# Altium PCB Wakame.PcbDoc (part 2 of 2)
Units mm, origin at the board's own origin, x right, y up, seen from the top; angles counter-clockwise.
Board outline 150 x 150 mm, 5 copper layers (FrontLayer, MidLayer1, MidLayer2, MidLayer3, BackLayer); 108 components, 145 nets, 766 pads, 136 vias.
Unrouted connection lines stored in the file: 5.
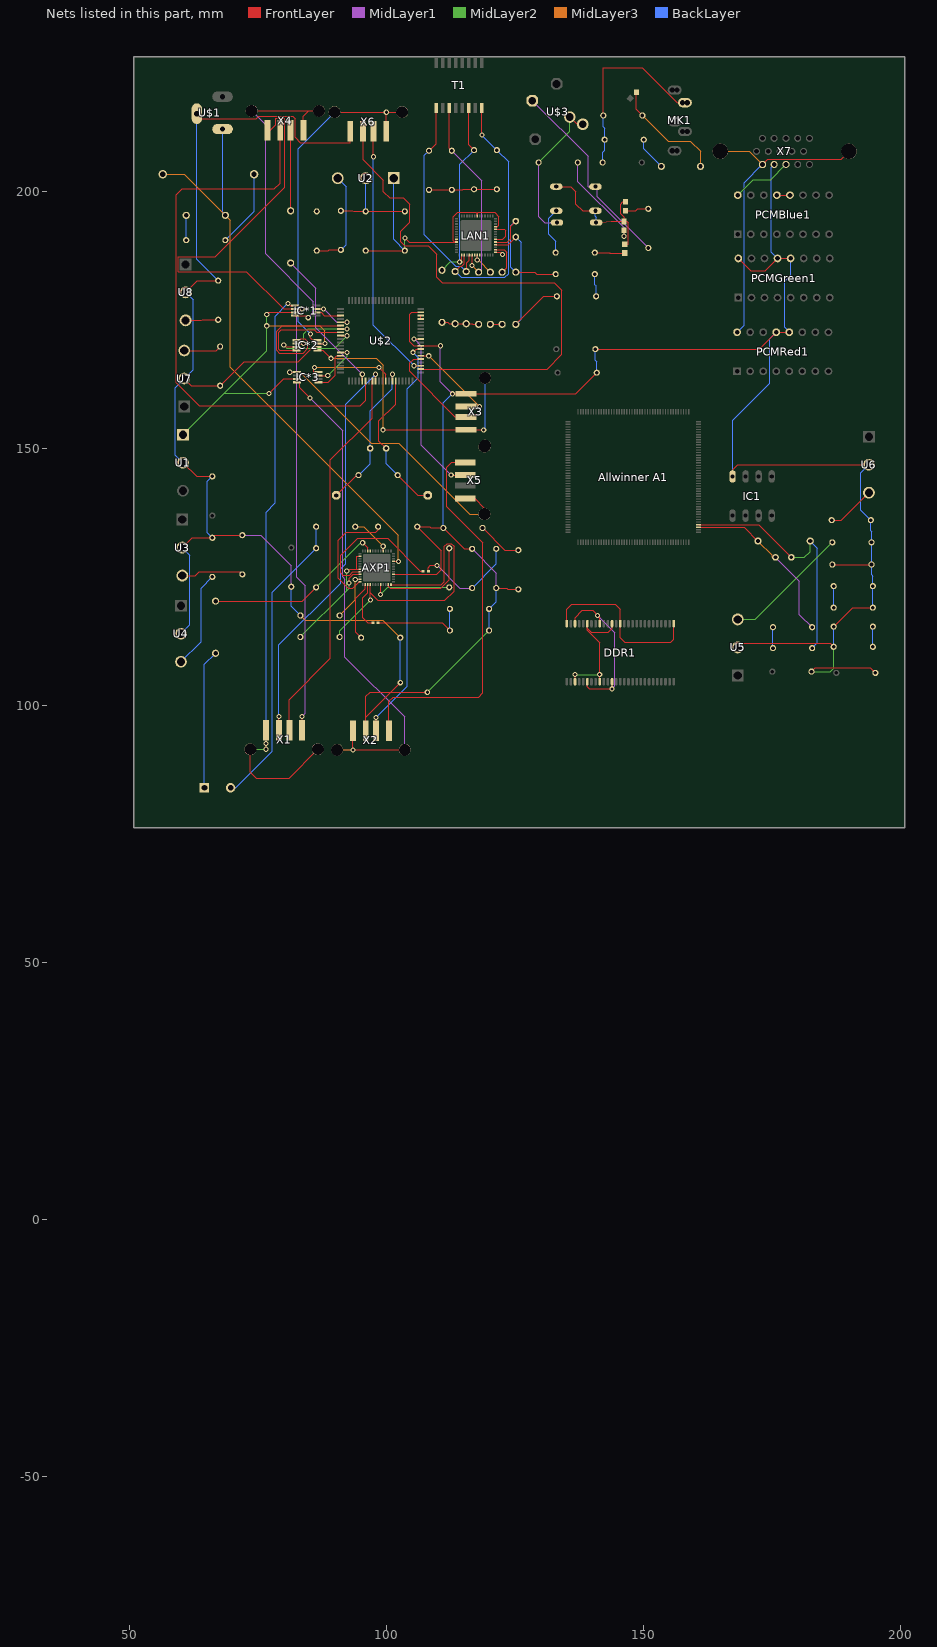
[diagram p5: the nets of this part, all layers, seen from the top]

## Via types
v1: diameter 1, hole 0.6, FrontLayer to BackLayer, 136 vias

## Nets (pads, with @x,y where several pads share a name; then routed paths per layer and width w, separated by ;. In a path a pad name is that pad's centre, name@x,y a point inside that pad or via, vN(x,y) a via of type N, cw(c..) or ccw(c..) an arc to the next point about the centre after c; other vN are vias at no path point) (continued)
"NetAllwinner A1_X24MIN": "Allwinner A1.X24MIN" C27.1 R16.1 Y3.1 | length 48.7
  FrontLayer w0.2: 160.655,135.149 172.344,135.149 Y3.1@178.715,128.778
  MidLayer2 w0.2: Y3.1@178.715,128.778 181.254,128.778 182.372,129.896 R16.1@182.372,131.953
  BackLayer w0.2: R16.1@182.372,131.953 183.769,130.556 183.769,112.141 C27.1@182.753,111.125
"NetAllwinner A1_X24OUT": "Allwinner A1.X24OUT" C28.2 R16.2 Y3.2 | length 34.2
  FrontLayer w0.2: 160.655,134.649 169.516,134.649 R16.2@172.212,131.953
  MidLayer1 w0.2: Y3.2@175.615,128.778 180.289,124.104 180.289,117.653 C28.2@182.753,115.189
  MidLayer3 w0.2: R16.2@172.212,131.953 174.981,129.184 174.981,128.778 Y3.2@175.615,128.778
NetAXP1_ACIN: AXP1.ACIN D4.2 R7.1 U$1.+ | length 114.7
  FrontLayer w0.2: AXP1.ACIN@101.321,127.996 v1(102.235,127.996)
  MidLayer3 w0.2: D4.2@56.388,203.327 60.579,203.327 R7.1@68.58,195.326 69.52,194.386 69.52,165.811 102.235,133.096 v1(102.235,127.996)
  BackLayer w0.2: U$1.+@68.032,212.115 68.032,195.874 R7.1@68.58,195.326
NetAXP1_BIAS: AXP1.BIAS C13.1 | length 19.2
  FrontLayer w0.2: AXP1.BIAS@100.294,123.471 100.294,123.139 100.7,122.733 110.465,122.733 112.141,124.409 C13.1@112.141,130.556
NetAXP1_EXTEN: AXP1.EXTEN C13.2 | length 15.8
  FrontLayer w0.2: v1(98.794,121.578) AXP1.EXTEN@98.794,123.471
  MidLayer2 w0.2: v1(98.794,121.578) 100.152,122.936 C13.2@112.141,122.936
NetAXP1_LDO1: AXP1.LDO1 C7.2 C9.2 C10.2 C12.2 C15.2 C17.2 C18.2 C22.1 C22.2 C33.1 C34.2 C35.1 C36.1 C37.2 C38.1 C39.1 C40.2 C41.1 C42.1 C43.2 C44.1 C45.1 C46.2 C47.1 C48.1 C49.2 C50.1 IC1.4 IC*2.6 PCMGreen1.12 PCMGreen1.13 PCMGreen1.16 PCMRed1.12 PCMRed1.13 U1.2 U3.2 U4.2 U5.2 U6.2 U7.2 U8.2 U$1.GND U$2.SELF_PWR U$2.USBDN5 X2.2 X3.4 X6.4 X7.2 | length 673.2
  FrontLayer w0.2: U3.2@60.198,130.683 62.103,132.588 C37.2@66.04,132.588 66.548,133.096 C34.2@71.882,133.096 ; U1.2@60.325,147.193 62.992,144.526 C33.1@66.04,144.526 ; U7.2@60.579,163.576 61.976,162.179 C46.2@67.564,162.179 72.212,166.827 82.804,166.827 85.705,169.728 IC*2.6@86.53,169.728 ; U8.2@60.833,180.34 63.119,182.626 C49.2@67.183,182.626 ; U$1.GND@63.017,215.113 63.017,214.122 74.6,214.122 75.108,214.63 81.686,214.63 82.169,214.147 82.169,210.49 83.185,209.474 92.888,209.474 X6.4@92.888,211.658 ; AXP1.LDO1@101.321,125.496 109.728,125.496 110.586,126.354 110.586,130.079 C18.2@105.918,134.747 108.331,134.747 108.585,134.493 C42.1@110.998,134.493 115.062,130.429 C12.2@116.586,130.429 ; v1(102.616,104.394) 100.762,102.54 ; U$2.SELF_PWR@106.606,176.467 104.851,176.467 104.496,176.111 104.496,170.688 105.232,169.951 U$2.USBDN5@106.606,169.951 v1(110.414,169.951) ; v1(107.874,102.54) 100.762,102.54 ; v1(112.751,160.604) X3.4@115.392,160.604 136.728,160.604 C50.1@140.843,164.719 ; C15.2@121.285,122.809 123.317,122.809 123.571,122.555 C44.1@125.603,122.555 ; C48.1@140.589,169.291 172.466,169.291 PCMRed1.13@175.768,172.593 PCMRed1.12@178.308,172.593 ; IC1.4@167.259,144.526 167.259,145.821 168.25,146.812 U6.2@193.802,146.812 ; U5.2@168.275,111.252 168.275,112.039 168.3,112.065 186.258,112.065 C36.1@186.944,111.379 ; PCMGreen1.16@168.402,186.944 170.84,184.506 173.584,184.506 PCMGreen1.13@176.022,186.944 PCMGreen1.12@178.562,186.944 ; C39.1@182.626,106.553 183.388,107.315 194.056,107.315 C41.1@195.072,106.299 ; C22.2@186.69,127.381 C22.1@194.31,127.381 ; C38.1@186.944,115.316 190.627,118.999 C45.1@194.564,118.999 ; 95.901,97.679 100.762,102.54 ; 95.901,97.679 95.901,101.718 96.723,102.54 100.762,102.54 ; 95.901,97.679 X2.2@95.901,95.047 95.901,97.679
  MidLayer1 w0.2: C34.2@71.882,133.096 75.463,133.096 81.407,127.152 C35.1@81.407,123.063 ; v1(110.414,169.951) 110.414,162.941 v1(112.751,160.604) ; C12.2@116.586,130.429 121.285,125.73 C15.2@121.285,122.809
  MidLayer2 w0.2: v1(107.874,102.54) C9.2@119.888,114.554 ; C39.1@182.626,106.553 186.309,106.553 186.944,107.188 C36.1@186.944,111.379
  MidLayer3 w0.2: C17.2@83.185,117.475 84.125,116.535 99.238,116.535 C10.2@102.616,113.157
  BackLayer w0.2: U4.2@59.944,113.919 61.671,115.646 61.671,129.21 U3.2@60.198,130.683 ; U1.2@60.325,147.193 58.826,148.692 58.826,161.823 U7.2@60.579,163.576 62.306,165.303 62.306,178.867 U8.2@60.833,180.34 ; U$1.GND@63.017,215.113 63.017,186.792 C49.2@67.183,182.626 ; C37.2@66.04,132.588 65.1,133.528 65.1,143.586 C33.1@66.04,144.526 ; C35.1@81.407,123.063 81.407,119.253 C17.2@83.185,117.475 ; v1(102.616,104.394) C10.2@102.616,113.157 ; C42.1@110.998,134.493 110.998,158.852 v1(112.751,160.604) ; C9.2@119.888,114.554 C7.2@119.888,118.745 121.285,120.142 C15.2@121.285,122.809 ; C48.1@140.589,169.291 140.589,167.132 140.843,166.878 C50.1@140.843,164.719 ; IC1.4@167.259,144.526 167.259,155.423 174.473,162.636 174.473,171.298 PCMRed1.13@175.768,172.593 ; X7.2@175.362,205.232 174.828,204.699 174.828,188.138 PCMGreen1.13@176.022,186.944 ; PCMRed1.12@178.308,172.593 177.394,173.507 177.394,182.55 178.562,183.718 PCMGreen1.12@178.562,186.944 ; C36.1@186.944,111.379 C38.1@186.944,115.316 ; U6.2@193.802,146.812 192.227,145.237 192.227,137.973 C43.2@194.183,136.017 194.183,133.909 194.31,133.782 C40.2@194.31,131.699 C22.1@194.31,127.381 194.31,125.4 194.564,125.146 C47.1@194.564,123.19 C45.1@194.564,118.999
NetAXP1_LDO2: AXP1.LDO2 C18.1 | length 22.1
  FrontLayer w0.2: AXP1.LDO2@94.769,123.996 94.64,123.996 93.377,122.733 92.514,122.733 90.576,124.67 90.576,132.105 92.1,133.629 97.815,133.629 98.298,134.112 C18.1@98.298,134.747
NetAXP1_LDO3IN: AXP1.LDO3IN C26.1 | length 7.9
  FrontLayer w0.2: v1(99.289,130.937) 99.294,130.932 AXP1.LDO3IN@99.294,130.023
  MidLayer3 w0.2: C26.1@93.853,134.747 95.479,134.747 v1(99.289,130.937)
NetAXP1_LDO4: AXP1.LDO4 C17.1 | length 9.2
  FrontLayer w0.2: v1(93.853,124.485) 93.864,124.496 AXP1.LDO4@94.769,124.496
  MidLayer3 w0.2: C17.1@90.805,117.475 93.853,120.523 v1(93.853,124.485)
NetAXP1_LX: AXP1.LX L1.1 | length 9.2
  FrontLayer w0.2: AXP1.LX@96.294,123.471 96.294,121.846 95.352,120.904 95.352,117.043 96.317,116.078 L1.1@97.29,116.078
NetAXP1_LX1: AXP1.LX1
NetAXP1_LX2: AXP1.LX2 L2.1 | length 27.7
  FrontLayer w0.2: AXP1.LX2@94.769,125.996 93.408,125.996 92.736,125.324 91.453,125.324 90.996,125.781 90.996,129.146 94.31,132.461 100.178,132.461 106.528,126.111 L2.1@107.069,126.111
NetAXP1_PGND1: AXP1.PGND1 C24.1 R15.1 | length 35.3
  FrontLayer w0.2: R15.1@66.675,120.269 83.566,120.269 C24.1@86.233,122.936 ; v1(95.301,131.623) 96.294,130.63 AXP1.PGND1@96.294,130.023
  MidLayer2 w0.2: C24.1@86.233,122.936 94.92,131.623 v1(95.301,131.623)
NetAXP1_PGND2: AXP1.PGND2 AXP1.SCK AXP1.VIN2 C11.2 | length 40.7
  FrontLayer w0.2: v1(92.202,126.136) 92.562,126.496 94.183,126.496 ; v1(92.659,123.8) 92.659,124.681 93.474,125.496 AXP1.PGND2@94.769,125.496 ; AXP1.SCK@94.769,128.996 94.183,128.996 94.183,126.496 ; 94.183,126.496 AXP1.VIN2@94.769,126.496 94.183,126.496
  MidLayer2 w0.2: v1(92.202,126.136) 92.202,123.8 92.202,122.301 ; v1(92.659,123.8) 92.659,122.758 92.202,122.301 ; 92.202,122.301 C11.2@83.185,113.284 92.202,122.301
NetAXP1_PGND3: AXP1.PGND3 AXP1.VREF C11.1 | length 60.4
  FrontLayer w0.2: v1(96.794,120.472) 96.794,121.92 ; AXP1.VREF@100.813,123.471 100.813,123.469 110.592,123.469 111.201,124.079 111.201,130.897 111.774,131.47 112.558,131.47 113.081,130.948 113.081,122.225 111.303,120.447 98.267,120.447 96.794,121.92 ; 96.794,121.92 AXP1.PGND3@96.794,123.471 96.794,121.92
  MidLayer2 w0.2: C11.1@90.805,113.284 90.805,114.483 v1(96.794,120.472)
NetAXP1_VIN3: AXP1.VIN3 C10.1 | length 11.5
  FrontLayer w0.2: C10.1@94.996,113.157 93.98,114.173 93.98,120.843 95.794,122.657 AXP1.VIN3@95.794,123.471
NetC1_1: C1.1 R2.2 | length 6.6
  BackLayer w0.2: C1.1@149.987,210.058 149.987,208.28 R2.2@153.416,204.851
NetC1_2: C1.2 C4.2 C8.2 MK1.2 | length 35.9
  FrontLayer w0.2: C4.2@142.113,214.757 142.113,224.028 149.733,224.028 156.511,217.25
  BackLayer w0.2: C8.2@141.986,205.613 141.986,207.645 142.367,208.026 C1.2@142.367,210.058 142.367,212.268 142.113,212.522 C4.2@142.113,214.757
NetC2_1: C2.1 D1.C U$3.LEFT2 | length 39
  MidLayer1 w0.2: U$3.LEFT2@128.321,217.653 139.192,206.781 139.192,200.914 D1.C@140.589,200.914 140.894,200.914 140.894,198.958 C2.1@150.876,188.976
NetC2_2: C2.2 R3.1 | length 4.6
  FrontLayer w0.2: R3.1@146.431,196.254 148.463,196.254 148.805,196.596 C2.2@150.876,196.596
NetC3_1: C3.1 D3.C U$3.RIGHT1 U$3.RIGHT2 | length 29
  FrontLayer w0.2: U$3.RIGHT2@135.611,214.452 137.008,213.055 U$3.RIGHT1@138.125,213.055
  MidLayer1 w0.2: C3.1@129.54,205.613 129.54,195.072 130.683,193.929 D3.C@133.096,193.929
  MidLayer2 w0.2: C3.1@129.54,205.613 135.611,211.684 U$3.RIGHT2@135.611,214.452
NetC3_2: C3.2 R5.1 | length 19.3
  FrontLayer w0.2: v1(146.177,191.262) R5.1@146.177,192.444
  MidLayer1 w0.2: C3.2@137.16,205.613 137.16,201.905 146.177,192.888 v1(146.177,191.262)
NetC4_1: C4.1 R2.1 R4.2 | length 22.1
  FrontLayer w0.2: R4.2@148.556,219.295 148.556,215.934 C4.1@149.733,214.757
  MidLayer3 w0.2: C4.1@149.733,214.757 154.762,209.728 159.08,209.728 161.036,207.772 R2.1@161.036,204.851
NetC5_1: C5.1 J1.2 U$2.XTAL2 Y1.1 | length 29.6
  FrontLayer w0.2: J1.2@90.17,140.843 94.107,144.78 C5.1@94.488,144.78 ; U$2.XTAL2@101.081,163.119 101.081,164.403 v1(101.092,164.414)
  BackLayer w0.2: C5.1@94.488,144.78 96.748,147.04 Y1.1@96.748,149.987 96.748,157.277 101.092,161.621 v1(101.092,164.414)
NetC5_2: C5.2 J1.1 U$2.XTAL1/CLKIN Y1.2 | length 28.7
  FrontLayer w0.2: Y1.2@99.848,149.987 98.45,151.385 98.45,155.321 101.731,158.602 U$2.XTAL1/CLKIN@101.731,163.119 ; C5.2@102.108,144.78 106.045,140.843 J1.1@107.95,140.843
  BackLayer w0.2: Y1.2@99.848,149.987 99.848,147.04 C5.2@102.108,144.78
NetC6_1: C6.1 D2.C | length 9.3
  BackLayer w0.2: C6.1@132.842,188.087 132.842,190.322 131.47,191.694 131.47,194.716 D2.C@132.969,196.215
NetC6_2: C6.2 R6.1 | length 5.9
  FrontLayer w0.2: C6.2@140.462,188.087 143.332,188.087 143.42,187.999 R6.1@146.304,187.999
NetC7_1: C7.1 C9.1 L1.2 | length 18.8
  FrontLayer w0.2: L1.2@98.29,116.078 110.744,116.078 C9.1@112.268,114.554
  BackLayer w0.2: C9.1@112.268,114.554 C7.1@112.268,118.745
NetC12_1: C12.1 C15.1 L2.2 | length 20.8
  FrontLayer w0.2: L2.2@108.069,126.111 108.069,126.797 108.475,127.203 v1(109.779,127.203)
  MidLayer1 w0.2: v1(109.779,127.203) 114.173,122.809 C12.1@116.586,122.809
  BackLayer w0.2: C12.1@116.586,122.809 121.285,127.508 C15.1@121.285,130.429
NetC14_1: C14.1 R7.2 | length 4.8
  BackLayer w0.2: C14.1@60.96,190.5 R7.2@60.96,195.326
NetC14_2: C14.2 D4.1 | length 15.1
  BackLayer w0.2: C14.2@68.58,190.5 74.168,196.088 D4.1@74.168,203.327
NetC16_1: C16.1 LAN1.2 R11.2 T1.14 | length 37.1
  FrontLayer w0.2: v1(114.173,186.258) 114.579,186.665 LAN1.2@114.579,187.589 ; T1.14@115.951,216.214 115.951,209.042 C16.1@116.967,208.026
  MidLayer2 w0.2: R11.2@110.744,184.658 112.344,186.258 v1(114.173,186.258)
  BackLayer w0.2: v1(114.173,186.258) 114.173,205.232 C16.1@116.967,208.026
NetC16_2: C16.2 C19.2 C20.2 C21.2 | length 13.3
  FrontLayer w0.2: C20.2@108.204,200.279 C21.2@112.649,200.279 114.732,200.279 114.859,200.406 C16.2@116.967,200.406 C19.2@121.412,200.406
NetC19_1: C19.1 LAN1.3 R10.2 T1.16 | length 49.7
  FrontLayer w0.2: R10.2@113.284,184.404 114.275,185.395 114.605,185.395 115.087,185.877 LAN1.3@115.087,187.589 ; v1(118.491,210.947) T1.16@118.491,216.214
  BackLayer w0.2: R10.2@113.284,184.404 114.452,183.236 122.961,183.236 123.723,183.998 123.723,205.715 C19.1@121.412,208.026 v1(118.491,210.947)
NetC20_1: C20.1 LAN1.5 R9.2 T1.9 | length 40.3
  FrontLayer w0.2: C20.1@108.204,207.899 109.601,209.296 T1.9@109.601,216.214 ; R9.2@115.443,184.404 115.443,185.013 115.57,185.013 115.57,186.131 116.078,186.639 LAN1.5@116.078,187.589
  BackLayer w0.2: C20.1@108.204,207.899 107.29,206.985 107.29,191.542 113.386,185.445 114.402,185.445 R9.2@115.443,184.404
NetC21_1: C21.1 LAN1.6 R8.2 T1.11 | length 38.6
  FrontLayer w0.2: T1.11@112.141,216.214 112.141,208.407 C21.1@112.649,207.899 ; v1(116.586,185.547) LAN1.6@116.586,187.589
  MidLayer1 w0.2: C21.1@112.649,207.899 118.44,202.108 118.44,184.861 R8.2@117.856,184.277
  MidLayer3 w0.2: v1(116.586,185.547) R8.2@117.856,184.277
NetC23_1: C23.1 C25.2 | length 4.4
  BackLayer w0.2: C25.2@140.462,183.896 140.462,181.864 140.716,181.61 C23.1@140.716,179.578
NetC23_2: C23.2 LAN1.18 R14.2 Y2.2 | length 32.7
  FrontLayer w0.2: LAN1.18@121.148,189.639 123.625,189.639 Y2.2@125.095,191.109 ; R14.2@125.095,174.117 130.556,179.578 C23.2@133.096,179.578
  BackLayer w0.2: R14.2@125.095,174.117 126.136,175.158 126.136,190.068 Y2.2@125.095,191.109
NetC24_2: C24.2 C26.2 S1.2 | length 58.3
  BackLayer w0.2: S1.2@69.596,83.947 70.612,83.947 77.699,91.034 77.699,122.022 C24.2@86.233,130.556 C26.2@86.233,134.747
NetC25_1: C25.1 LAN1.19 R14.1 Y2.1 | length 25.7
  FrontLayer w0.2: LAN1.19@121.148,190.139 123.439,190.139 124.104,190.805 124.104,193.218 Y2.1@125.095,194.209 ; R14.1@125.095,184.277 128.778,184.277 129.159,183.896 C25.1@132.842,183.896
  BackLayer w0.2: R14.1@125.095,184.277 124.145,185.227 124.145,193.259 Y2.1@125.095,194.209
NetC27_2: C27.2 C28.1 | length 4.1
  BackLayer w0.2: C27.2@175.133,111.125 C28.1@175.133,115.189
NetC29_1: C29.1 C31.1 C32.2 U2.2 | length 19
  FrontLayer w0.2: C32.2@91.059,196.215 93.396,196.215 93.523,196.088 C29.1@95.885,196.088 C31.1@103.505,196.088
  BackLayer w0.2: C29.1@95.885,196.088 U2.2@95.885,202.565
NetC29_2: C29.2 C31.2 LAN1.25 LAN1.35 LAN1.51 LAN1.52 U2.1 | length 54
  FrontLayer w0.2: C29.2@95.885,188.468 C31.2@103.505,188.468 ; v1(103.505,190.952) 104.318,190.139 113.182,190.139 ; LAN1.51@113.538,190.639 LAN1.52@113.538,190.139 ; LAN1.35@117.598,195.199 117.598,195.682 ; LAN1.25@121.148,193.142 121.514,193.142 121.768,193.396 121.768,195.072 120.955,195.885 117.801,195.885 117.598,195.682 ; 113.182,190.139 LAN1.52@113.538,190.139 ; 113.182,190.139 112.928,190.393 112.928,195.097 113.792,195.961 117.319,195.961 117.598,195.682 ; 113.182,190.139 LAN1.52@113.538,190.139
  MidLayer2 w0.2: C31.2@103.505,188.468 v1(103.505,190.952)
  BackLayer w0.2: U2.1@101.335,202.565 101.335,190.638 C31.2@103.505,188.468
NetC30_1: C30.1
NetC30_2: C30.2 C32.1 U2.3 | length 19.8
  FrontLayer w0.2: C30.2@86.36,188.468 88.646,188.468 88.773,188.595 C32.1@91.059,188.595
  BackLayer w0.2: U2.3@90.435,202.565 92.075,200.925 92.075,189.611 C32.1@91.059,188.595
NetC34_1: C34.1 U3.3 | length 12.2
  FrontLayer w0.2: U3.3@60.198,125.233 62.738,125.233 63.489,125.984 71.374,125.984 C34.1@71.882,125.476
NetC36_2: C36.2 C38.2 | length 3.9
  BackLayer w0.2: C36.2@194.564,111.379 C38.2@194.564,115.316
NetC37_1: C37.1 U4.3 | length 19
  BackLayer w0.2: U4.3@59.944,108.469 63.881,112.406 63.881,122.809 C37.1@66.04,124.968
NetC40_1: C40.1 U5.3 | length 24.6
  MidLayer2 w0.2: U5.3@168.275,116.702 171.693,116.702 C40.1@186.69,131.699
NetC42_2: C42.2 C44.2 | length 8.8
  FrontLayer w0.2: C42.2@118.618,134.493 122.936,130.175 C44.2@125.603,130.175
NetC43_1: C43.1 U6.3 | length 9.5
  FrontLayer w0.2: C43.1@186.563,136.017 188.457,136.017 U6.3@193.802,141.362
NetC45_2: C45.2 C47.2 | length 4.2
  BackLayer w0.2: C45.2@186.944,118.999 C47.2@186.944,123.19
NetC46_1: C46.1 U7.3 | length 7.3
  FrontLayer w0.2: U7.3@60.579,169.026 66.791,169.026 C46.1@67.564,169.799
NetC49_1: C49.1 U8.3 | length 6.4
  FrontLayer w0.2: U8.3@60.833,174.89 63.932,174.89 64.048,175.006 C49.1@67.183,175.006
NetD1_A: D1.A D2.A D3.A R3.2 R5.2 R6.2 | length 29.4
  FrontLayer w0.2: D1.A@132.969,200.914 135.814,200.914 136.779,199.949 136.779,197.51 138.074,196.215 D2.A@140.589,196.215 ; D3.A@140.716,193.929 143.649,194.144 R5.2@146.177,194.144 ; R6.2@146.304,189.699 146.99,189.699 147.015,189.724 147.015,193.839 146.71,194.144 R5.2@146.177,194.144 ; R3.2@146.431,197.954 145.898,197.954 145.478,197.535 145.478,195.675 146.177,194.977 R5.2@146.177,194.144
  BackLayer w0.2: D2.A@140.589,196.215 140.589,195.123 140.716,194.996 D3.A@140.716,193.929
NetDDR1_3: DDR1.3 DDR1.9 DDR1.43 DDR1.49 | length 27.1
  FrontLayer w0.2: DDR1.3@136.615,104.586 136.615,105.957 v1(136.627,105.969) ; DDR1.43@143.815,115.886 143.815,114.986 143.053,114.224 139.802,114.224 139.015,115.01 ; 139.015,115.01 DDR1.49@139.015,115.886 139.015,115.01 ; 139.015,115.01 139.015,114.605 141.415,112.205 v1(141.415,105.969) ; v1(141.415,105.969) DDR1.9@141.415,104.586 v1(141.415,105.969)
  MidLayer2 w0.2: v1(136.627,105.969) v1(141.415,105.969)
NetDDR1_6: DDR1.6 DDR1.12 DDR1.46 DDR1.52 | length 33.2
  FrontLayer w0.2: DDR1.52@136.615,115.886 136.615,117.043 138.012,118.44 140.018,118.44 141.015,117.444 141.415,117.043 ; DDR1.6@139.015,104.586 139.015,103.632 139.421,103.226 143.79,103.226 v1(143.815,103.2) DDR1.12@143.815,104.586 ; v1(141.021,117.45) 141.415,117.055 141.415,117.043 ; 141.415,117.043 DDR1.46@141.415,115.886 141.415,117.043
  MidLayer1 w0.2: v1(141.021,117.45) 144.374,114.097 144.374,103.759 v1(143.815,103.2)
NetDDR1_28: DDR1.28 DDR1.41 DDR1.54 | length 33.6
  FrontLayer w0.2: DDR1.54@135.015,115.886 135.015,118.669 135.955,119.609 144.475,119.609 145.415,118.669 DDR1.41@145.415,115.886 145.415,113.132 146.304,112.243 155.245,112.243 155.815,112.813 DDR1.28@155.815,115.886
NetIC*1_2: IC*1.2 U$2.OCS2_N | length 5
  FrontLayer w0.2: IC*1.2@86.276,176.459 87.193,176.459 87.835,175.817 U$2.OCS2_N@90.983,175.817
NetIC*1_3: IC*1.3 U$2.OCS3_N | length 8.4
  FrontLayer w0.2: IC*1.3@86.276,177.109 v1(87.681,177.109) ; U$2.OCS3_N@90.983,174.517 92.272,174.517 v1(92.278,174.523)
  MidLayer1 w0.2: v1(87.681,177.109) 90.266,174.523 v1(92.278,174.523)
NetIC*1_5: IC*1.5 X1.1 | length 118.8
  FrontLayer w0.2: X1.1@73.44,91.44 73.44,86.97 74.583,85.827 80.975,85.827 X1.1@86.589,91.44 ; v1(76.505,92.532) v1@76.51,92.537 ; v1(76.51,91.44) 76.51,92.532 v1@76.51,92.537 ; v1(80.756,178.181) 81.178,177.759 IC*1.5@82.126,177.759 ; v1@76.51,92.537 X1.1@76.51,95.174 v1@76.51,92.537
  MidLayer2 w0.2: X1.1@73.44,91.44 v1(76.51,91.44)
  BackLayer w0.2: v1(76.505,92.532) 76.505,137.592 78.283,139.37 78.283,175.707 v1(80.756,178.181)
NetIC*1_6: IC*1.6 X1.4 X4.4 | length 158.2
  FrontLayer w0.2: X4.4@76.759,211.912 77.335,211.912 78.376,212.954 78.376,214.219 80.112,214.219 80.112,214.02 80.137,213.995 80.137,200.762 66.615,187.24 59.383,187.24 59.383,184.34 72.677,184.34 79.908,177.109 IC*1.6@82.126,177.109 v1(83.528,177.109) ; X1.4@83.515,95.174 v1(83.515,97.815)
  MidLayer1 w0.2: v1(83.515,97.815) 84.125,98.425 84.125,123.241 82.474,124.892 82.474,176.055 v1(83.528,177.109)
NetIC*1_7: IC*1.7 IC*2.7 IC*3.7 U1.1 | length 83
  FrontLayer w0.2: v1(76.632,176.047) 77.043,176.459 IC*1.7@82.126,176.459 ; v1(77.084,160.68) 79.908,163.505 IC*3.7@82.507,163.505 ; IC*2.7@86.53,170.378 87.93,170.378 v1(87.935,170.383)
  MidLayer2 w0.2: v1(76.632,176.047) v1(76.632,173.838) ; v1(77.084,160.68) 68.362,160.68 ; 68.362,160.68 76.632,168.95 ; 68.362,160.68 U1.1@60.325,152.643 68.362,160.68 ; 76.632,168.95 v1(76.632,173.838) ; 76.632,168.95 v1(76.632,173.838)
  MidLayer3 w0.2: v1(76.632,173.838) 86.97,173.838 87.935,172.872 v1(87.935,170.383)
NetIC*1_8: IC*1.8 X4.1 | length 67.7
  FrontLayer w0.2: X4.1@73.685,215.646 84.831,215.646 ; IC*1.8@82.126,175.809 84.312,175.809 v1(84.709,175.412) ; X4.1@83.764,211.912 83.764,214.579 84.831,215.646 ; 84.831,215.646 X4.1@86.834,215.646 84.831,215.646
  MidLayer1 w0.2: X4.1@73.685,215.646 76.403,212.928 76.403,187.833 85.674,178.562 85.674,176.378 v1(84.709,175.412)
NetIC*2_1: IC*2.1 U$2.PRTPWR4 | length 27.1
  FrontLayer w0.2: IC*2.1@82.38,171.028 83.007,171.028 83.277,171.298 84.039,171.298 84.633,170.704 84.633,169.469 83.693,168.529 79.096,168.529 78.537,169.088 78.537,172.771 79.633,173.867 U$2.PRTPWR4@90.983,173.867
NetIC*2_2: IC*2.2 U$2.OCS4_N | length 13.5
  FrontLayer w0.2: IC*2.2@82.38,170.378 v1(83.795,170.378) ; U$2.OCS4_N@90.983,173.217 92.267,173.217 v1(92.278,173.228)
  MidLayer2 w0.2: v1(83.795,170.378) 83.795,172.288 84.734,173.228 v1(92.278,173.228)
NetIC*2_3: IC*2.3 U$2.VSS5 | length 17.5
  FrontLayer w0.2: v1(79.934,170.129) 80.335,169.728 IC*2.3@82.38,169.728 ; U$2.VSS5@90.983,171.917 92.268,171.917 v1(92.278,171.907)
  MidLayer2 w0.2: v1(79.934,170.129) 80.569,169.494 89.865,169.494 v1(92.278,171.907)
NetIC*2_4: IC*2.4 U$2.PRTPWR5 | length 19.2
  FrontLayer w0.2: IC*2.4@82.38,169.078 79.182,169.078 78.969,169.291 78.969,172.542 79.477,173.05 85.912,173.05 86.396,172.567 U$2.PRTPWR5@90.983,172.567
NetIC*2_5: IC*2.5 X3.1 | length 56.3
  FrontLayer w0.2: IC*2.5@86.53,169.078 87.564,169.078 v1(89.129,167.513) ; v1(99.263,153.599) X3.1@115.392,153.599 118.841,153.599 v1(118.847,153.594)
  MidLayer3 w0.2: v1(89.129,167.513) 97.917,167.513 99.263,166.167 v1(99.263,153.599)
  BackLayer w0.2: v1(118.847,153.594) 119.126,153.873 X3.1@119.126,163.678
NetIC*2_8: IC*2.8 X6.1 | length 69.4
  FrontLayer w0.2: v1(85.115,172.247) 85.115,171.501 85.588,171.028 IC*2.8@86.53,171.028 ; X6.1@89.814,215.392 v1(99.893,215.392) ; X6.1@99.893,211.658 v1(99.893,215.392) ; X6.1@102.963,215.392 v1(99.893,215.392)
  MidLayer2 w0.2: v1(99.893,215.392) X6.1@102.963,215.392
  BackLayer w0.2: v1(85.115,172.247) 82.728,174.635 82.728,208.305 X6.1@89.814,215.392
NetIC*3_1: IC*3.1 U$2.PRTPWR7 | length 8.5
  FrontLayer w0.2: IC*3.1@86.657,162.855 88.595,162.855 89.941,164.201 89.941,167.716 90.221,167.996 U$2.PRTPWR7@90.983,167.996
NetIC*3_3: IC*3.3 U$2.OCS6_N | length 9.2
  FrontLayer w0.2: IC*3.3@86.657,164.155 v1(88.494,164.155) ; U$2.OCS6_N@90.983,168.656 v1(92.278,168.656)
  MidLayer2 w0.2: v1(88.494,164.155) 92.278,167.94 v1(92.278,168.656)
NetIC*3_4: IC*3.4 U$2.VDD18.2 | length 17.6
  FrontLayer w0.2: v1(85.954,165.735) 85.75,165.532 85.75,164.805 IC*3.4@86.657,164.805 ; v1(98.45,165.735) 99.781,164.404 U$2.VDD18.2@99.781,163.119
  MidLayer3 w0.2: v1(85.954,165.735) v1(98.45,165.735)
NetIC*3_5: IC*3.5 X5.1 | length 56.4
  FrontLayer w0.2: v1(81.102,164.805) IC*3.5@82.507,164.805 ; X5.1@115.265,140.264 117.114,140.264 118.999,138.379 X5.1@118.999,137.194
  MidLayer3 w0.2: v1(81.102,164.805) 83.15,164.805 96.977,150.978 102.311,150.978 116.095,137.194 X5.1@118.999,137.194
NetIC*3_8: IC*3.8 X2.1 | length 100.5
  FrontLayer w0.2: IC*3.8@82.507,162.855 83.083,162.855 83.083,161.747 v1(85.039,159.791) ; X2.1@90.331,91.313 v1(93.401,91.313) ; X2.1@93.401,95.047 v1(93.401,91.313) ; X2.1@103.48,91.313 v1(93.401,91.313)
  MidLayer1 w0.2: v1(85.039,159.791) 91.39,153.441 91.39,124.98 91.846,124.524 91.846,109.372 103.48,97.739 X2.1@103.48,91.313
  MidLayer2 w0.2: X2.1@90.331,91.313 v1(93.401,91.313)
NetLAN1_7: LAN1.7 LAN1.9 LAN1.15 | length 1.5
  FrontLayer w0.2: LAN1.15@121.148,188.139 122.123,188.139 122.486,187.776 v1(122.486,187.733)
NetLAN1_8: LAN1.8 R12.2 | length 4.5
  FrontLayer w0.2: v1(117.598,186.665) LAN1.8@117.598,187.589
  MidLayer3 w0.2: v1(117.598,186.665) 117.754,186.665 R12.2@120.142,184.277
NetLAN1_16: LAN1.16 R13.1 | length 6.6
  FrontLayer w0.2: LAN1.16@121.148,188.639 122.816,188.639 123.317,188.138 123.317,185.166 R13.1@122.428,184.277
NetLAN1_20: LAN1.20 LAN1.24 | length 5.5
  FrontLayer w0.2: LAN1.20@121.148,190.639 122.542,190.639 123.139,191.237 123.139,192.405 122.885,192.659 LAN1.24@121.148,192.659
NetPCMBlue1_12: PCMBlue1.12 PCMBlue1.13 | length 2.5
  FrontLayer w0.2: PCMBlue1.13@175.895,199.263 PCMBlue1.12@178.435,199.263
NetPCMBlue1_16: PCMBlue1.16 X7.3 | length 11.9
  MidLayer2 w0.2: PCMBlue1.16@168.275,199.263 171.298,202.286 174.716,202.286 X7.3@177.662,205.232
NetPCMRed1_16: PCMRed1.16 X7.1 | length 61.8
  FrontLayer w0.2: X7.1@173.076,205.232 174.092,206.248 188.395,206.248 X7.1@189.919,207.772
  MidLayer3 w0.2: X7.1@164.897,207.772 170.536,207.772 X7.1@173.076,205.232
  BackLayer w0.2: PCMRed1.16@168.148,172.593 169.545,173.99 169.545,201.701 X7.1@173.076,205.232
NetR1_1: R1.1 X4.2 | length 15.7
  FrontLayer w0.2: X4.2@81.264,211.912 81.264,204.08 81.28,204.064 R1.1@81.28,196.215
NetR1_2: R1.2 U$2.USBDN1 | length 28.7
  FrontLayer w0.2: U$2.USBDN1@95.225,163.119 v1(95.225,164.414)
  MidLayer1 w0.2: R1.2@81.28,186.055 86.208,181.127 86.208,173.431 v1(95.225,164.414)
NetR8_1: R8.1 R9.1 R10.1 R11.1 | length 7.3
  FrontLayer w0.2: R11.1@110.744,174.498 111.887,174.498 112.141,174.244 R10.1@113.284,174.244 R9.1@115.443,174.244 116.586,174.244 116.713,174.117 R8.1@117.856,174.117
NetR12_1: R12.1 R13.2 | length 2.3
  FrontLayer w0.2: R12.1@120.142,174.117 R13.2@122.428,174.117
NetR15_2: R15.2 S1.1 | length 27.1
  BackLayer w0.2: S1.1@64.516,83.947 64.516,107.95 R15.2@66.675,110.109
NetU$2_TEST0: U$2.TEST0 U$2.TEST1 | length 0.7
  FrontLayer w0.2: U$2.TEST0@106.606,175.167 U$2.TEST1@106.606,175.817
NetU$2_USBDN2: U$2.USBDN2 X1.2 | length 78.3
  FrontLayer w0.2: X1.2@79.01,95.174 v1(79.01,97.815) ; U$2.USBDN2@97.815,163.119 v1(97.815,164.414)
  BackLayer w0.2: v1(79.01,97.815) 79.01,111.801 90.996,123.787 90.996,126.55 91.973,127.527 91.973,158.572 v1(97.815,164.414)
NetU$2_USBDN3: U$2.USBDN3 X6.2 | length 50.2
  FrontLayer w0.2: v1(97.393,206.731) X6.2@97.393,211.658 ; v1(105.308,166.065) U$2.USBDN3@106.606,166.065
  BackLayer w0.2: v1(97.393,206.731) 97.393,173.981 v1(105.308,166.065)
NetU$2_USBDN4: U$2.USBDN4 X3.2 | length 18.7
  FrontLayer w0.2: U$2.USBDN4@106.606,167.361 105.232,167.361 104.47,166.599 104.47,165.024 113.182,156.099 X3.2@115.392,156.099
NetU$2_USBDN6: U$2.USBDN6 X5.3 | length 33.5
  FrontLayer w0.2: v1(105.308,171.272) 105.314,171.267 U$2.USBDN6@106.606,171.267 ; v1(112.522,144.78) X5.3@115.265,144.78
  MidLayer1 w0.2: v1(105.308,171.272) 106.731,169.85 106.731,150.571 v1(112.522,144.78)
NetU$2_USBDP1: U$2.USBDP1 X4.3 | length 111.1
  FrontLayer w0.2: X4.3@79.248,211.912 79.248,201.574 78.13,200.457 60.147,200.457 58.979,199.288 58.979,162.712 63.449,158.242 94.793,158.242 95.86,159.309 U$2.USBDP1@95.86,163.119
NetU$2_USBDP2: U$2.USBDP2 X1.3 | length 74.6
  FrontLayer w0.2: X1.3@81.026,95.174 81.026,101.117 89.027,109.118 89.027,147.726 97.18,155.88 U$2.USBDP2@97.18,163.119
NetU$2_USBDP3: U$2.USBDP3 X6.3 | length 106.5
  FrontLayer w0.2: X6.3@95.377,211.658 95.377,206.121 99.339,202.159 99.339,199.949 100.559,198.73 103.226,198.73 104.445,197.51 104.445,193.98 102.667,192.202 102.667,190.221 103.48,189.408 108.026,189.408 109.703,187.731 109.703,183.286 110.769,182.22 132.563,182.22 134.036,180.746 134.036,168.275 131.166,165.405 U$2.USBDP3@106.606,165.405
NetU$2_USBDP4: U$2.USBDP4 X3.3 | length 18.2
  FrontLayer w0.2: U$2.USBDP4@106.606,167.996 v1(108.153,167.996) ; X3.3@115.392,158.115 v1(118.034,158.115)
  MidLayer3 w0.2: v1(108.153,167.996) v1(118.034,158.115)
NetU$2_USBDP5: U$2.USBDP5 X2.3 | length 79.3
  FrontLayer w0.2: X2.3@97.917,95.047 v1(97.917,97.638) ; v1(105.054,168.681) 105.689,169.316 U$2.USBDP5@106.606,169.316
  BackLayer w0.2: v1(97.917,97.638) 103.962,103.683 103.962,161.544 106.147,163.728 106.147,167.589 v1(105.054,168.681)
NetX2_4: X2.4 X5.4 | length 75.4
  FrontLayer w0.2: X2.4@100.406,95.047 100.406,100.787 101.219,101.6 117.856,101.6 118.669,102.413 118.669,131.623 111.684,138.608 111.684,146.304 112.649,147.269 X5.4@115.265,147.269
pads on no net: "Allwinner A1.AGND" "Allwinner A1.CSI_D0/SDC_D0/PE4" "Allwinner A1.CSI_D2/SDC2_D2/PE6" "Allwinner A1.CSI_D3/SDC2_D3/PE7" "Allwinner A1.CSI_D4/SDC2_CMD/PE8" "Allwinner A1.CSI_D5/SDC2_CLK/PE9" "Allwinner A1.CSI_D6/UART1_TX/PE10" "Allwinner A1.CSI_D7/UART1_RX/PE11" "Allwinner A1.CSI_DI/SDC2_DI/PE5" "Allwinner A1.CSI_HSYNC/SP2_MOSI/P" "Allwinner A1.CSI_MCLK/SPI2_CLK/EI" "Allwinner A1.CSI_PCLK/SPI2_CS0/EI" "Allwinner A1.CSI_VSYNC/SPI2_MISO/" "Allwinner A1.DDR3_A13" "Allwinner A1.DDR3_A14" "Allwinner A1.DDR3_BA1" "Allwinner A1.DDR3_BA2" "Allwinner A1.DDR3_CK" "Allwinner A1.DDR3_CK_N" "Allwinner A1.DDR3_D0" "Allwinner A1.DDR3_D1" "Allwinner A1.DDR3_D2" "Allwinner A1.DDR3_D3" "Allwinner A1.DDR3_D4" "Allwinner A1.DDR3_D5" "Allwinner A1.DDR3_D6" "Allwinner A1.DDR3_D7" "Allwinner A1.DDR3_D9" "Allwinner A1.DDR3_D10" "Allwinner A1.DDR3_D11" "Allwinner A1.DDR3_D12" "Allwinner A1.DDR3_D13" "Allwinner A1.DDR3_D14" "Allwinner A1.DDR3_D15" "Allwinner A1.DDR3_DM0" "Allwinner A1.DDR3_DM1" "Allwinner A1.DDR3_DQS0_N" "Allwinner A1.DDR3_DQS1_N" "Allwinner A1.DDR3_ODT" "Allwinner A1.DDR3_R8" "Allwinner A1.DDR3_RAS" "Allwinner A1.DDR3_RST" "Allwinner A1.DDR3_WE" "Allwinner A1.DZQ" "Allwinner A1.HPBP" "Allwinner A1.HPCOM" "Allwinner A1.HPOUTL" "Allwinner A1.HPOUTR" "Allwinner A1.LCD_CLK/PD24" "Allwinner A1.LCD_D6/PD6" "Allwinner A1.LCD_D7/PD7" "Allwinner A1.LCD_D20/PD20" "Allwinner A1.LCD_VSYNC/PD27" "Allwinner A1.LRADC" "Allwinner A1.NALE/SPIO_MISO/PCI" "Allwinner A1.NC" "Allwinner A1.NCE0" "Allwinner A1.NCE1/SPIO0/PC3" "Allwinner A1.NCLE/SPIO_CLK/PC2" "Allwinner A1.NDQ0/SDC2_D0/PC8" "Allwinner A1.NDQ1/SDC2_D1/PC9" "Allwinner A1.NDQ2/SDC2_D2/PC10" "Allwinner A1.NDQ3/SDC2_D3/PC11" "Allwinner A1.NDQ4/SDC2_D4/PC12" "Allwinner A1.NDQ5/SDC2_D5/PC13" "Allwinner A1.NDQ6/SDC2_D6/PC14" "Allwinner A1.NDQ7/SDC2_D7/PC15" "Allwinner A1.NDQS/PC19" "Allwinner A1.NMI_N" "Allwinner A1.NRB0/SDC2_CMD/PC6" "Allwinner A1.NRB1/SDC2_CLK/PC7" "Allwinner A1.NRE" "Allwinner A1.NWE/SPIO_MOSI/PC0" "Allwinner A1.PB2/EINT16" "Allwinner A1.PB3/EINT17" "Allwinner A1.PB4_EINT18" "Allwinner A1.PB10/EINT24" "Allwinner A1.PB15" "Allwinner A1.PB16" "Allwinner A1.PB17" "Allwinner A1.PB18" "Allwinner A1.PG0/EINT0" "Allwinner A1.PG1/EINT1" "Allwinner A1.PG2/EINT2" "Allwinner A1.PG3/UART1_TX/EINT3" "Allwinner A1.PG4/UART1_RX/EINT14" "Allwinner A1.PG9/SPI1_CS0/UART3_T" "Allwinner A1.PG10/SPI1_CLK/UART3_" "Allwinner A1.PG11/SPI1_MOSI/EINT1" "Allwinner A1.PG12/SPI1_MISO/UART3" "Allwinner A1.RESET_N" "Allwinner A1.SDC0/PF1" "Allwinner A1.SDC0_DI/PF0" "Allwinner A1.SVREF" "Allwinner A1.TPX1" "Allwinner A1.TPX2" "Allwinner A1.TPY1" "Allwinner A1.TPY2" "Allwinner A1.TWI0-SCK/PB0" "Allwinner A1.TWIO-SDA/PB1" "Allwinner A1.UBOOT" "Allwinner A1.UDM0" "Allwinner A1.UDM1" "Allwinner A1.UDP0" "Allwinner A1.V33_HP" "Allwinner A1.V33_USB" "Allwinner A1.VCC1_DRAM" "Allwinner A1.VCC2" "Allwinner A1.VDD1_CPU" "Allwinner A1.VDD1_INT" "Allwinner A1.VDD2_CPU/PB10/EINT24" "Allwinner A1.VDD2_INT" "Allwinner A1.VDD3_CPU" "Allwinner A1.VDD4_CPU" "Allwinner A1.VDD5_CPU" "Allwinner A1.VRA1" "Allwinner A1.VRA2" "Allwinner A1.VRP" AXP1.ACIN1 AXP1.AGND AXP1.APS AXP1.BACKUP AXP1.BAT AXP1.BAT1 AXP1.BATSENSE AXP1.CHGLED AXP1.CHSENSE AXP1.DC3SET AXP1.DCDC2 AXP1.DCDC3 AXP1.EXP AXP1.GPIO0 AXP1.GPIO1 AXP1.GPIO2 AXP1.GPIO3 AXP1.IPSOUT AXP1.IPSOUT1 AXP1.IRQ AXP1.LDO3 AXP1.LDO24IN AXP1.N_OE AXP1.N_VBUSEN AXP1.PWREN AXP1.PWROK AXP1.PWRON AXP1.SDA AXP1.TS AXP1.VBUS AXP1.VIN1 AXP1.VINT DDR1.2 DDR1.4 DDR1.7 DDR1.8 DDR1.10 DDR1.13 DDR1.15 DDR1.16 DDR1.18 DDR1.19 DDR1.21 DDR1.38 DDR1.39 DDR1.40 DDR1.42 DDR1.44 DDR1.45 DDR1.47 DDR1.48 DDR1.50 DDR1.51 DDR1.53 IC1.3 IC1.7 IC*1.1 IC*3.2 IC*3.6 LAN1.1 LAN1.4 LAN1.10 LAN1.11 LAN1.12 LAN1.13 LAN1.14 LAN1.17 LAN1.21 LAN1.22 LAN1.23 LAN1.26 LAN1.27 LAN1.28 LAN1.29 LAN1.30 LAN1.31 LAN1.32 LAN1.33 LAN1.34 LAN1.36 LAN1.37 LAN1.38 LAN1.39 LAN1.40 LAN1.41 LAN1.42 LAN1.43 LAN1.44 LAN1.45 LAN1.46 LAN1.47 LAN1.48 LAN1.49 LAN1.50 LAN1.53 LAN1.54 LAN1.55 LAN1.56 LAN1.EPAD MK1.1A MK1.1B MK1.2A MK1.2B MK1.3 MK1.3A MK1.3B MK1.4 MK1.4A MK1.4B MK1.5 MK1.5A MK1.5B PCMBlue1.5 PCMBlue1.6 PCMBlue1.7 PCMBlue1.8 PCMBlue1.9 PCMBlue1.10 PCMBlue1.14 PCMBlue1.15 PCMGreen1.7 PCMGreen1.8 PCMGreen1.9 PCMGreen1.10 PCMGreen1.14 PCMGreen1.15 PCMRed1.7 PCMRed1.8 PCMRed1.9 PCMRed1.10 PCMRed1.14 PCMRed1.15 T1.1 T1.2 T1.3 T1.4 T1.5 T1.6 T1.7 T1.8 T1.10 T1.12 T1.13 T1.15 U1.3 U4.1 U6.1 U7.1 U$1.GND1 U$2.AM1/GANG_EN U$2.AM2/MTT_EN U$2.AM3 U$2.AM4/LED_EN U$2.AM5 U$2.AM6 U$2.AM7 U$2.ATEST/REG_EN U$2.CFG_SEL1 U$2.CLKIN_EN U$2.GR1/NON_REM0 U$2.GR2_NON_REM1 U$2.GR3/PRT_DIS0 U$2.GR4/PRT_DIS1 U$2.GR5 U$2.GR6 U$2.GR7 U$2.OCS1_N U$2.OCS5_N U$2.OCS7_N U$2.PRTPWR1 U$2.PRTPWR2 U$2.PRTPWR6 U$2.PRTPWR_POL U$2.RBIAS U$2.RESET_N U$2.SCL/SMBCLK/CFG_SEL0 U$2.SDA/SMBDATA U$2.USBDN7 U$2.USBDP0 U$2.USBDP6 U$2.USBDP7 U$2.VBUS_DET U$2.VDD18 U$2.VDD18.3 U$2.VDD33CR U$2.VDDA3.1 U$2.VDDA18/PLL U$2.VDDA33 U$2.VDDA33.2 U$2.VDDA33/PLL U$2.VSS U$2.VSS0 U$2.VSS1 U$2.VSS3 U$2.VSS4 U$2.VSS6 U$2.VSS7 U$2.VSS8 U$2.VSS9 U$3.GND U$3.LEFT1 X5.2 X7.4 X7.5 X7.6 X7.7 X7.8 X7.9 X7.10 X7.11 X7.12 X7.15
copper on no net: | length 124
  FrontLayer w0.2: 60.884,221.107 61.671,221.894 ; 70.993,219.71 71.044,219.761 ; 73.914,91.44 77.978,87.376 ; 85.014,213.538 85.598,214.122 ; 109.906,180.315 111.658,180.315 111.658,179.695 ; 110.668,180.289 111.176,180.797 ; 111.481,179.705 111.76,179.984 ; 113.563,193.351 113.563,193.939 ; 125.983,178.358 125.983,181.12 ; 126.644,225.577 126.644,227.533
  FrontLayer w0.254: 53.095,219.202 cw(c56.515,219.202) 59.935,219.202 ; 53.095,219.202 ccw(c56.515,219.202) 59.935,219.202 ; 53.095,219.202 cw(c56.515,219.202) 59.935,219.202 ; 53.095,219.202 ccw(c56.515,219.202) 59.935,219.202 ; 55,82.931 cw(c58.42,82.931) 61.84,82.931 cw(c58.42,82.931) 55,82.931 ; 190.509,82.804 cw(c193.929,82.804) 197.349,82.804 cw(c193.929,82.804) 190.509,82.804 ; 192.033,219.964 cw(c195.453,219.964) 198.873,219.964 cw(c195.453,219.964) 192.033,219.964

## Keep-outs
Keep-Out Layer:
  lines w0.254: 50.8,76.2 50.8,226.2 ; 50.8,76.2 200.8,76.2 ; 50.8,76.2 200.8,76.2 ; 50.8,76.2 50.8,226.2 ; 50.8,76.2 200.8,76.2 ; 50.8,76.2 50.8,226.2 ; 50.8,226.2 200.8,226.2 ; 50.8,226.2 200.8,226.2 ; 50.8,226.2 200.8,226.2 ; 200.8,76.2 200.8,226.2 ; 200.8,76.2 200.8,226.2 ; 200.8,76.2 200.8,226.2
  lines w0.3: 38.705,44.891 38.705,42.291 41.305,42.291 ; 38.705,56.338 41.305,56.338 ; 51.557,42.291 51.557,44.891 ; 51.557,203.738 51.557,56.338 198.956,56.338 ; 51.557,224.9 198.956,224.9 ; 194.564,-73.74 194.564,73.66

## Other copper
FrontLayer:
  text "Wakame Single Board Computer" at 110.236,94.615 h1.52
  text "Licenced under GNU LGPL terms" at 110.744,88.519 h1.52
  text "2016, 2017" at 156.464,88.519 h1.52

## Silkscreen, mask and mechanical layers (free items; w line width, h text height)
Top Overlay:
  text "This was routed in 3 internal layers plus front and back" at 110.363,91.186 h1.52
  text "https://sites.google.com/site/wakameboard" at 109.855,85.598 h1.52
Drill Drawing:
  text "Drill Drawing." at 205.88,70.996 h1.52

## Dimensions
30.834,35.397 to 51.557,56.338 on Mechanical 1
33.006,30.047 to 51.557,56.338 on Mechanical 1

## Text inside footprints (layer, text, board x,y; h text height)
"Allwinner A1": Mechanical 2 "ALLWINNER  A13" at 140.716,144.399 h1.97
AXP1: Mechanical 2 ">AXP202" at 95.044,130.759 h1.97
U1: Top Overlay "3" at 60.792,144.772 h1.5 r270; Top Overlay "1" at 58.346,144.772 h1.5 r270
U2: Top Overlay "3" at 90.943,207.145 h1.5 r180; Top Overlay "1" at 101.335,207.145 h1.5 r180
U3: Top Overlay "3" at 55.618,125.741 h1.5 r270; Top Overlay "1" at 55.618,136.133 h1.5 r270
U4: Top Overlay "3" at 55.364,108.977 h1.5 r270; Top Overlay "1" at 55.364,119.369 h1.5 r270
U5: Top Overlay "3" at 172.855,116.194 h1.5 r90; Top Overlay "1" at 172.855,105.802 h1.5 r90
U6: Top Overlay "3" at 189.222,141.87 h1.5 r270; Top Overlay "1" at 189.222,152.262 h1.5 r270
U7: Top Overlay "3" at 65.159,168.518 h1.5 r90; Top Overlay "1" at 65.159,158.126 h1.5 r90
U8: Top Overlay "3" at 56.253,175.398 h1.5 r270; Top Overlay "1" at 56.253,185.79 h1.5 r270
U$1: Mechanical 2 "PWR_IN" at 70.612,225.933 h2.76 r270
U$3: Top Overlay "3,5mm" at 137.033,222.631 h1.97 r270; Mechanical 16 "1" at 131.953,222.25 h1.97 r270; Mechanical 16 "2" at 137.033,211.709 h1.97 r270; Mechanical 16 "3" at 134.493,213.106 h1.97 r270; Mechanical 16 "4" at 130.429,210.439 h1.97 r270; Mechanical 16 "5" at 128.524,216.027 h1.97 r270
X1: Top Overlay "USB" at 78.994,80.01 h1.57
X2: Top Overlay "USB" at 95.901,82.779 h1.57
X3: Top Overlay "USB" at 127.66,156.099 h1.57 r90
X4: Top Overlay "USB" at 81.264,224.18 h1.57 r180
X5: Top Overlay "USB" at 127.533,142.764 h1.57 r90
X6: Top Overlay "USB" at 97.393,223.926 h1.57 r180
X7: Top Overlay "Female" at 175.006,217.424 h1.97 r180; Top Overlay "11" at 171.425,211.037 h1.97 r180; Top Overlay "15" at 185.239,211.337 h1.97 r180; Top Overlay "10" at 184.534,208.437 h1.97 r180; Top Overlay "6" at 170.815,208.337 h1.97 r180; Top Overlay "5" at 184.334,205.765 h1.97 r180; Top Overlay "1" at 171.933,205.664 h1.97 r180; Mechanical 16 "HDF15 CONEC" at 183.483,222.489 h1.97 r180